# Altium PCB RF-2530.PcbDoc
Units mm, origin at the board's own origin, x right, y up, seen from the top; angles counter-clockwise.
Board outline 32 x 39.69 mm, 2 copper layers (Top Layer, Bottom Layer); 36 components, 37 nets, 133 pads, 92 vias.
Unrouted connection lines stored in the file: 6.
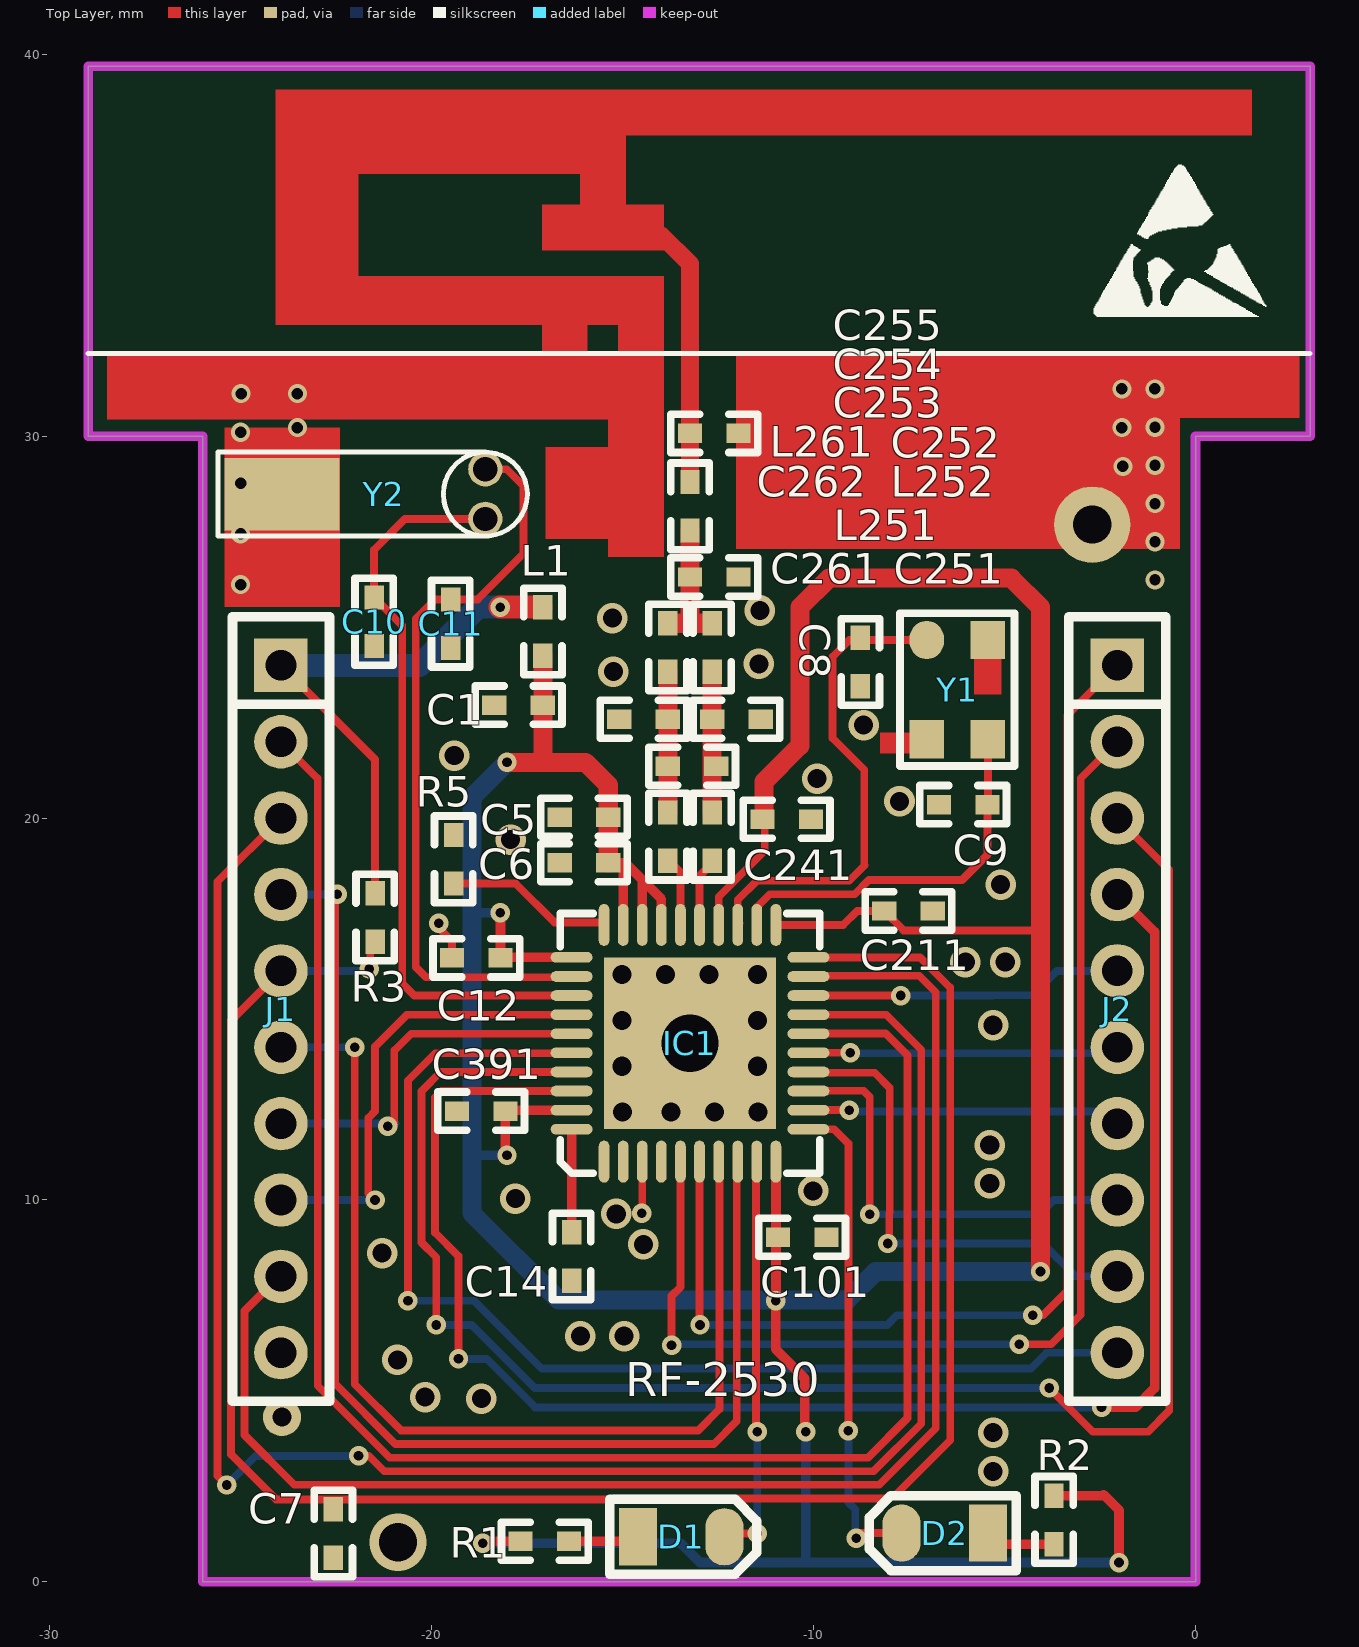
[diagram p0: Top Layer view]
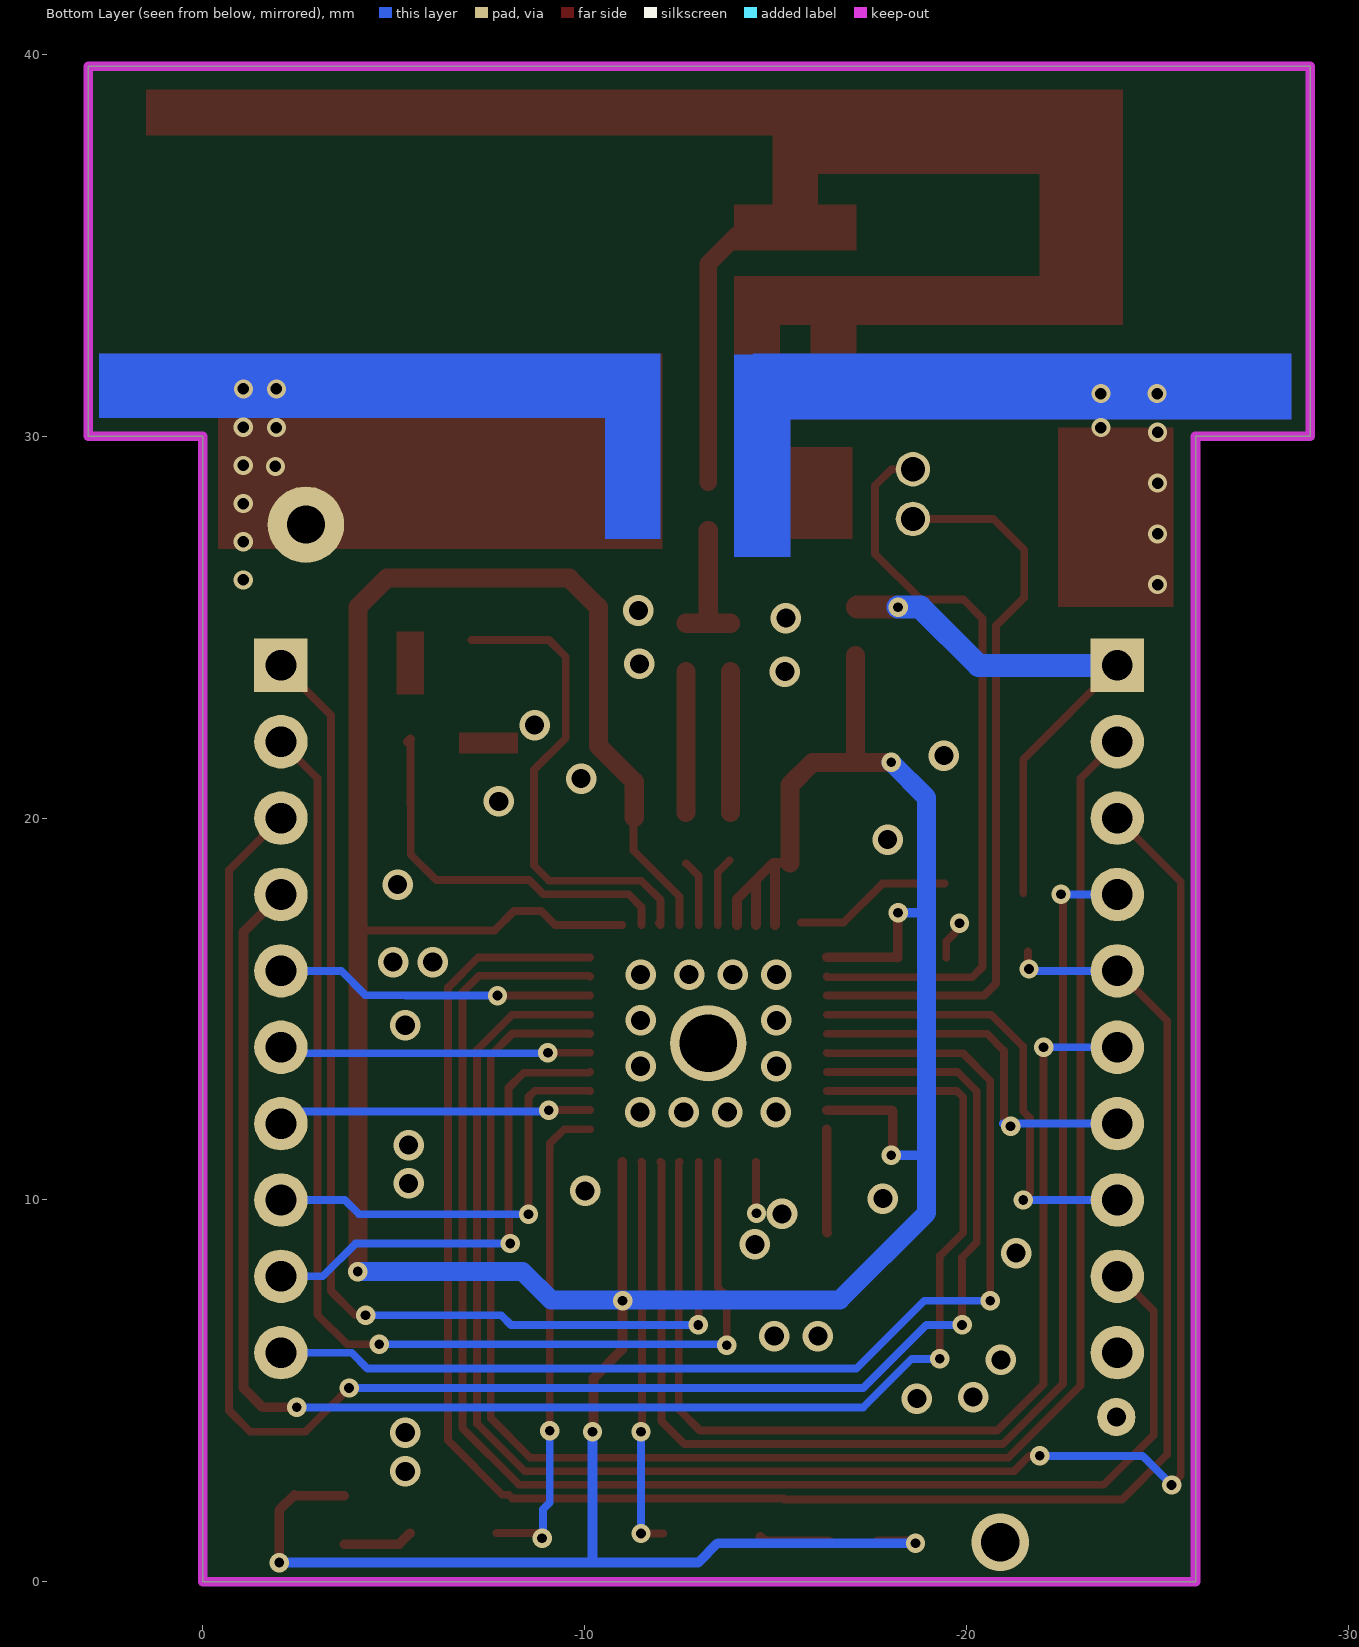
[diagram p1: Bottom Layer view, seen from below]

## Layer stack, top to bottom
Top Layer: signal copper 0.0356
Dielectric: dielectric 0.32, FR-4, Dk 4.8
Bottom Layer: signal copper 0.0356

## Board outline
-29,30 -29,39.692 3,39.692 3,30 0,30 0,0 -26,0 -26,30

## Design rules (kind name [scope] priority, off if disabled: settings)
Clearance Clearance_1 [All] p1 off: gap=0.4
Clearance [All] p2: gap=0.152
FabricationTestPointUsage TestPointUsage [All] p1: valid=0 allowmultiple=FALSE
FabricationTestpoint Testpoint [All] p1: side=3 testpointundercomponent=TRUE minsize=1.016 maxsize=2.54 preferedsize=1.524 minholesize=0 maxholesize=1.016 preferedholesize=0.813 testpointgrid=0.025 allowsidetop=TRUE allowsidebottom=TRUE usegrid=TRUE gridtolerance=0
MinimumSolderMaskSliver [All] p1: minsoldermaskwidth=0.01
PolygonConnect [All] p1: connectstyle=Direct reliefconductorwidth=0.254 reliefentries=4 polygonreliefangle="90 Angle" airgapwidth=0.254
RoutingVias [All] p1: holewidth=0.254 width=0.508 viastyle="Through Hole" minholewidth=0.203 minwidth=0.508 maxholewidth=0.711 maxwidth=1.27
SilkToSilkClearance [All] p1: silktosilkclearance=0
SilkToSolderMaskClearance SilkscreenOverComponentPads [IsPad] p1: minsilkscreentomaskgap=0 clearancetoexposedcopper=TRUE
SolderMaskExpansion [All] p1: expansion=0.102
Width [All] p1: maxlimit=2.032 minlimit=0.2 preferedwidth=0.203
23 further rules are at their usual default settings.

## Components (designator, comment, footprint, x,y, rotation, side; value= is the part's Value field where it differs from the comment)
C1 "2.2u" 0402 -17.092,22.959 r180 top
C5 "0.1" 0402 -15.381,20.024 r180 top
C6 "220p" 0402 -15.381,18.83 r180 top
C7 "0.1" 0402 -22.578,1.902 r270 top
C8 "27pF" 0402 -8.777,24.723 r270 top
C9 "27pF" 0402 -5.449,20.354 r180 top
C10 "15pF" 0402 -21.512,25.778 r270 top
C11 "15pF" 0402 -19.507,25.727 r270 top
C12 "0.1" 0402 -18.2,16.341 r180 top
C14 "1uF" 0402 -16.339,9.157 r270 top
C101 "0.1" 0402 -10.936,9.025 r0 top
C211 "0.1" 0402 -8.153,17.568 r0 top
C241 "0.1" 0402 -11.342,19.973 r0 top
C251 "18p" 0402 -12.659,18.881 r90 top
C252 "1p" 0402 -12.659,23.834 r90 top
C253 "" 0402 -13.239,26.314 r0 top
C254 "2.2p" 0402 -13.239,27.531 r90 top
C255 "" 0402 -13.239,30.074 r0 top
C261 "18p" 0402 -13.819,18.881 r90 top
C262 "1p" 0402 -13.819,22.589 r180 top
C391 "1u" 0402 -18.073,12.327 r180 top
D1 "LED" LED-0603 -15.339,0.251 r0 top
D2 "LED" LED-0603 -4.697,2.207 r180 top
IC1 "CC2530" PVQFN-N40 -15.489,11.004 r90 top locked
J1 "CON10" SIP10-2.0 -23.95,24 r270 top locked
J2 "CON10" SIP10-2.0 -2.05,24 r270 top locked
L1 "?H" 0402 -17.092,24.254 r90 top
L251 "" 0402 -13.819,21.359 r0 top
L252 "2nH" 0402 -12.659,22.589 r0 top
L261 "2nH" 0402 -13.819,23.834 r90 top
R1 "330R" 0402 -16.406,1.064 r180 top
R2 "330R" 0402 -3.706,0.988 r90 top
R3 "10K" 0402 -21.486,16.761 r90 top
R5 "56K" 0402 -19.429,18.285 r90 top
Y1 "32M" XT-SMD3225 -7.738,25.364 r270 top
Y2 "32.768K" XT_3 -18.599,27.836 r90 top

## Footprints (in the part's own frame and the unit in brackets; to place one, negate y for a bottom-side part, rotate by r counter-clockwise, add the part's x,y. Pads: shape width x height; smd on the part's side, far side on the other; paste and mask are expansions set on the pad)
0402 [mil]
  rect 25x20 smd: 1(0,0) 2(50,0)
  silkscreen extent -20,-20 70,20
LED-0603 [mm]
  rect 1x1.5 smd: A(0.737,0.93)
  oval 1x1.5 smd: K(3,0.93)
  silkscreen extent 0,-0.05 3.84,1.91
PVQFN-N40 [mm]
  oval 1.1x0.28 smd: 1(0,0) 2(0,-0.5) 3(0,-1) 4(0,-1.5) 5(0,-2) 6(0,-2.5) 7(0,-3) 8(0,-3.5) 9(0,-4) 10(0,-4.5) 21(6.2,-4.5) 22(6.2,-4) 23(6.2,-3.5) 24(6.2,-3) 25(6.2,-2.5) 26(6.2,-2) 27(6.2,-1.5) 28(6.2,-1) 29(6.2,-0.5) 30(6.2,0)
  oval 0.28x1.1 smd: 11(0.85,-5.35) 12(1.35,-5.35) 13(1.85,-5.35) 14(2.35,-5.35) 15(2.85,-5.35) 16(3.35,-5.35) 17(3.85,-5.35) 18(4.35,-5.35) 19(4.85,-5.35) 20(5.35,-5.35) 31(5.35,0.85) 32(4.85,0.85) 33(4.35,0.85) 34(3.85,0.85) 35(3.35,0.85) 36(2.85,0.85) 37(2.35,0.85) 38(1.85,0.85) 39(1.35,0.85) 40(0.85,0.85)
  rect 4.5x4.5 smd: 41(3.1,-2.25)
  silkscreen extent -0.3,-5.65 6.5,1.15
SIP10-2.0 [mm]
  rect 1.4x1.4 hole 0.8: 1(0,0)
  round 1.4 hole 0.8: 2(2,0) 3(4,0) 4(6,0) 5(8,0) 6(10,0) 7(12,0) 8(14,0) 9(16,0) 10(18,0)
  silkscreen extent -1.27,-1.27 19.27,1.27
XT-SMD3225 [mm]
  oval 1x0.9 smd: 1(0.7,0.7)
  rect 1x0.9 smd: 2(3.3,2.3) 3(3.3,0.7) 4(0.7,2.3)
  silkscreen extent 0,0 4,3
XT_3 [mm]
  round 0.9 hole 0.635: 1(1.3,0) 2(0,0)
  rect 1.9x3 smd: ""(0.65,5.325)
  silkscreen extent -0.45,-1.1 1.75,7

## Part data
C1 C5 C6 C7 C8 C9 C10 C11 C12 C14 C101 C211 C241 C251 C252 C253 C254 C255 C261 C262 C391: library part CAP, "Capacitor"
IC1: library part CC2430
J1 J2: "Connector"
L1 L251 L252 L261: library part INDUCTOR
R1 R2 R3 R5: library part RES2
Y1: library part CRY
Y2: library part CRYSTAL, "Crystal"

## Free pads (board coordinates)
  round 2 hole 1.5: 0(-13.239,14.104)
  round 2 hole 1: 1(-2.703,27.686)
  round 1 hole 0.5: 4(-23.925,4.315)

## Via types
v1: diameter 0.8, hole 0.5, Top Layer to Bottom Layer, 39 vias
v2: diameter 0.508, hole 0.254, Top Layer to Bottom Layer, 36 vias
v3: diameter 0.5, hole 0.3, Top Layer to Bottom Layer, 16 vias
v4: diameter 1.5, hole 1, Top Layer to Bottom Layer, 1 vias

## Nets (pads, with @x,y where several pads share a name; then routed paths per layer and width w, separated by ;. In a path a pad name is that pad's centre, name@x,y a point inside that pad or via, vN(x,y) a via of type N, cw(c..) or ccw(c..) an arc to the next point about the centre after c; other vN are vias at no path point)
1VCC1.8: C14.1 IC1.40 | length 2.7
  Top Layer w0.254: C14.1@-16.355,9.141 C14.1 IC1.40
CSN: IC1.6 J2.1 | length 31.3
  Top Layer w0.203: IC1.6 -12.989,6.74 v2(-12.977,6.728) ; v2(-4.265,6.982) -3.995,6.982 -3.36,7.617 -3.36,22.69 J2.1
  Bottom Layer w0.203: v2(-12.977,6.728) -8.075,6.728 -7.821,6.982 -5.916,6.982 v2(-4.265,6.982) ; J2.1@-2.05,23.908 J2.1
DC: IC1.34 J1.8 | length 12.1
  Top Layer w0.203: v2(-21.486,10) -21.664,10.178 -21.664,12.145 -21.486,12.323 -21.486,14.018 -20.65,14.854 IC1.34
  Bottom Layer w0.203: J1.8 v2(-21.486,10)
DD: IC1.35 J1.7 | length 10.2
  Top Layer w0.203: v2(-21.156,11.935) -21.029,11.935 -20.981,11.982 -20.981,13.913 -20.541,14.354 IC1.35
  Bottom Layer w0.203: J1.7 -20.953,12 -21.018,11.935 v2(-21.156,11.935)
GND: C1.2 C5.2 C6.2 C7.2 C8.2 C9.2 C10.2 C11.2 C12.2 C14.2 C101.2 C211.2 C241.2 C253.2 C254.2 C255.1 C255.2 C262.2 C391.2 IC1.1 IC1.2 IC1.3 IC1.4 IC1.41 J1.10 L252.2 pad.0 pad.1 pad.4 R5.2 Y1.3 Y1.4 Y2. | length 9.2
  Top Layer w0.2: v2@-19.945,17.244 -19.47,16.769 C12.2 ; v2(-14.501,9.649) -14.489,9.661 IC1.3
  Top Layer w0.46: -13.989,35.262 -13.239,34.512 ; C254.2 -13.239,31.961 -13.239,34.511
  other v1: -5.303,2.893 -5.303,3.909 -18.703,4.798 -20.173,4.837 -20.903,5.814 -16.109,6.437 -14.966,6.437 -21.303,8.608 -14.458,8.837 -15.17,9.637 -17.811,10.037 -10.013,10.237 -5.391,10.437 -5.391,11.437 -15.01,12.304 -13.74,12.304 -12.597,12.304 -11.454,12.304 -15.024,13.504 -11.468,13.504 -5.303,14.577 -15.024,14.704 -11.468,14.704 -15.024,15.904 -13.881,15.904 -12.738,15.904 -11.468,15.904 -6.026,16.228 -4.984,16.228 -5.103,18.26 -17.938,19.437 -7.753,20.437 -9.912,21.037 -19.411,21.637 -8.693,22.437 -15.246,23.837 -11.436,24.037 -15.271,25.237 -11.41,25.437
  other v2: -19.818,17.244
  other v3: -25.005,26.114 -1.062,26.237 -1.062,27.237 -25.005,27.444 -1.062,28.237 -25.005,28.775 -1.905,29.21 -1.062,29.237 -25.005,30.106 -23.52,30.226 -1.93,30.226 -1.062,30.237 -24.994,31.115 -23.52,31.115 -1.93,31.242 -1.067,31.242
  other v4: -20.885,1.037
LED1: D2.K IC1.11 | length 12.9
  Top Layer w0.203: IC1.11 -9.467,11.854 -9.091,11.478 v2(-9.091,3.959) ; v2(-8.888,1.14) -8.751,1.277 D2.K
  Bottom Layer w0.203: v2(-9.091,3.959) -9.091,2.08 -8.913,1.902 -8.913,1.165 v2(-8.888,1.14)
LED2: D1.K IC1.9 | length 10.3
  Top Layer w0.203: D1.K@-12.063,1.267 v2(-11.479,1.267) ; IC1.9 -11.507,10.986 -11.507,6.474 -11.507,3.963 v2(-11.479,3.934)
  Bottom Layer w0.203: v2(-11.479,1.267) v2(-11.479,3.934)
MISO: IC1.37 J2.3 | length 47.5
  Top Layer w0.203: v2(-19.886,6.728) -19.886,8.503 -20.27,8.887 -20.27,12.846 -19.763,13.354 IC1.37 ; v2(-3.833,5.077) -2.69,3.934 -1.242,3.934 -0.69,4.487 -0.69,16.38 ; J2.3 -0.69,18.64 -0.69,16.38 ; -0.69,16.833 -0.69,16.38
  Bottom Layer w0.203: v2(-19.886,6.728) -18.951,6.728 -17.3,5.077 -5.408,5.077 v2(-3.833,5.077)
MOSI: IC1.38 J2.4 | length 43
  Top Layer w0.203: v2(-19.302,5.839) -19.302,8.531 -19.915,9.144 -19.915,12.687 -19.748,12.854 IC1.38
  Top Layer w0.254: v2(-2.462,4.569) -1.573,4.569 -1.071,5.071 -1.071,17.021 J2.4
  Bottom Layer w0.203: v2(-19.302,5.839) -18.565,5.839 -17.295,4.569 v2(-2.462,4.569)
NetC1_1: C1.1 C5.1 C6.1 C12.1 C101.1 C211.1 C241.1 C391.1 IC1.10 IC1.21 IC1.24 IC1.27 IC1.28 IC1.29 IC1.31 IC1.39 L1.1 R1.2 R2.2 | length 121.7
  Top Layer w0.203: IC1.24 -12.489,17.943 -11.283,19.149 -11.283,19.914 C241.1 ; IC1.21 -9.226,17.204 -8.861,17.568 C211.1 -7.645,17.06 -6.051,17.06 -4.259,17.06 -4.062,16.863
  Top Layer w0.254: v2@-18.616,1.064 R1.2 ; v2@-18.2,17.514 C12.1 -18.187,16.354 IC1.31 ; v2@-18.073,11.214 C391.1 -18.047,12.354 IC1.39 ; C6.1@-15.344,18.793 C6.1 -14.94,18.83 -14.903,18.793 ; -15.009,18.793 -14.903,18.793 ; IC1.29 -14.989,18.773 ; IC1.28 -14.489,18.379 ; IC1.27 -13.989,17.879 -14.489,18.379 ; v2(-10.996,7.363) -10.996,6.093 -10.234,5.331 v2@-10.234,3.959 ; v2@-10.989,7.37 IC1.10 ; R2.2 -2.436,2.258 -2.411,2.283 -2.004,1.877 v2(-2.004,0.505) ; -14.903,18.793 -14.489,18.379
  Top Layer w0.5: v2(-18.032,21.46) -17.041,21.46 ; L1.1 C1.1 -17.092,21.511 -17.041,21.46 ; C6.1 C5.1 -15.381,20.866 -15.974,21.46 -17.041,21.46 ; C241.1@-11.301,20.014 -11.301,20.952 -10.361,21.892 -10.361,25.524 -9.599,26.286 -4.824,26.286 -4.062,25.524 -4.062,16.863 v2(-4.062,8.125)
  Bottom Layer w0.254: -18.953,11.173 v2(-18.032,11.173) ; -18.953,17.523 v2(-18.21,17.523) ; v2(-18.667,1.013) -13.485,1.013 -12.977,0.505 -10.209,0.505 ; v2(-10.209,3.934) -10.209,0.505 ; v2(-2.004,0.505) -10.209,0.505
  Bottom Layer w0.5: v2(-18.032,21.46) -18.953,20.539 -18.953,17.523 -18.953,11.173 -18.953,9.655 -16.682,7.384 -9.12,7.384 -8.38,8.125 v2(-4.062,8.125)
NetC8_1: C8.1 IC1.23 Y1.1 | length 12.9
  Top Layer w0.203: IC1.23@-11.944,17.249 IC1.23 -11.989,17.859 -11.485,18.363 -9.072,18.363 -8.667,18.768 -8.675,18.776 -8.675,21.264 -9.505,22.094 -9.505,24.229 -9.07,24.664 Y1.1
NetC9_1: C9.1 IC1.22 Y1.2 | length 10.2
  Top Layer w0.203: IC1.22 -11.489,17.671 -11.152,18.008 -9.277,18.008 -8.925,18.008 -8.553,18.379 -6.114,18.379 -5.449,19.044 C9.1 ; C9.1@-5.438,20.354 Y1.2
  Top Layer w0.254: Y1.2 Y1.2@-5.373,21.999
NetC10_1: C10.1 IC1.33 Y2.2 | length 19.5
  Top Layer w0.203: Y2.2 -20.704,27.836 -21.512,27.028 C10.1 -20.775,25.041 -20.775,15.669 -20.46,15.354 IC1.33
NetC11_1: C11.1 IC1.32 Y2.1 | length 19.8
  Top Layer w0.203: Y2.1 -18.036,29.136 -17.602,28.702 -17.602,26.924 -18.799,25.727 C11.1 -19.914,25.727 -20.419,25.221 -20.419,16.101 -20.151,15.833 -16.36,15.833 IC1.32
NetC251_1: C251.1 IC1.25 | length 1.7
  Top Layer w0.203: IC1.25 -12.989,18.485 C251.1@-12.659,18.815
NetC251_2: C251.2 C252.1 L251.2 L252.1 | length 3.7
  Top Layer w0.5: C251.2 C252.1
NetC252_2: C252.2 C253.1 C254.1 L261.2 | length 3.6
  Top Layer w0.5: L261.2 C252.2 ; -13.239,25.112 C254.1
NetC254_2: 
NetC261_1: C261.1 IC1.26 | length 1.8
  Top Layer w0.203: C261.1@-13.798,18.895 -13.489,18.586 IC1.26
NetC261_2: C261.2 C262.1 L251.1 L261.1 | length 3.7
  Top Layer w0.5: C261.2 L261.1
NetD1_A: D1.A R1.1 | length 1.9
  Top Layer w0.254: R1.1 -14.72,1.064 D1.A
NetD2_A: D2.A R2.1 | length 1.8
  Top Layer w0.254: D2.A -5.144,0.988 R2.1
NetIC1_30: IC1.30 R5.1 | length 4.2
  Top Layer w0.203: R5.1 -17.803,18.285 -16.787,17.269 -15.67,17.269
P00: IC1.19 J1.9 | length 38.8
  Top Layer w0.203: J1.9 -23.999,8 -24.904,7.095 -24.904,3.847 -23.598,2.541 -8.285,2.541 -6.805,4.02 -6.805,15.44 -7.237,15.872 -10.121,15.872 IC1.19
P01: IC1.18 J2.5 | length 8.4
  Top Layer w0.203: IC1.18 v2(-7.719,15.354)
  Bottom Layer w0.203: v2(-7.719,15.354) -5.317,15.354 -5.306,15.364 -4.265,15.364 -3.629,16 J2.5
P1.2: IC1.8 J1.4 | length 32.6
  Top Layer w0.203: v2(-22.477,18.006) -22.502,18.031 -22.528,18.031 -22.528,5.184 -20.951,3.607 -12.877,3.607 -12.618,3.607 -12.012,4.213 -12.012,5.077 -12.012,10.981 IC1.8
  Bottom Layer w0.203: J1.4 -22.482,18 v2(-22.477,18.006)
P1.3: IC1.7 J1.6 | length 27.5
  Top Layer w0.203: v2(-22.02,14) -22.02,5.179 -20.804,3.963 -13.024,3.963 -12.469,4.518 -12.469,10.984 IC1.7
  Bottom Layer w0.203: J1.6 v2(-22.02,14)
P02: IC1.17 J1.3 | length 50.6
  Top Layer w0.203: v2(-25.372,2.537) -25.615,2.78 -25.615,18.335 J1.3 ; v2(-21.918,3.299) -21.649,3.299 -21.246,2.896 -8.432,2.896 -7.186,4.142 -7.186,13.936 -8.103,14.854 IC1.17
  Bottom Layer w0.203: v2(-25.372,2.537) -24.61,3.299 v2(-21.918,3.299)
P03: IC1.16 J1.2 | length 46.3
  Top Layer w0.203: J1.2 -22.985,21.035 -22.985,5.138 -21.099,3.252 -8.579,3.252 -7.542,4.29 -7.542,4.876 -7.542,13.789 -8.114,14.362 -10.131,14.362 IC1.16 IC1.16@-10.134,14.348
P04: IC1.15 J2.6 | length 8.2
  Top Layer w0.203: IC1.15 v2(-9.04,13.854)
  Bottom Layer w0.203: v2(-9.04,13.854) -9.027,13.84 -7.516,13.84 -2.21,13.84 J2.6
P05: IC1.14 J2.9 | length 12.8
  Top Layer w0.203: IC1.14 -10.118,13.332 -8.405,13.332 -8.007,12.934 -8.007,9.668 -8.024,9.65 -8.024,8.895 v2(-8.058,8.862)
  Bottom Layer w0.203: v2(-8.058,8.862) -4.004,8.862 -3.142,8 J2.9
P06: IC1.13 J2.8 | length 11.4
  Top Layer w0.203: IC1.13 -10.131,12.862 -8.697,12.862 -8.532,12.697 v2(-8.532,9.624)
  Bottom Layer w0.203: v2@-8.515,9.624 -4.095,9.624 -3.719,10 J2.8
P07: IC1.12 J2.7 | length 8.3
  Top Layer w0.203: IC1.12 v2(-9.066,12.354)
  Bottom Layer w0.203: v2(-9.066,12.354) -9.066,12.316 -2.366,12.316 J2.7
P20: IC1.36 J2.10 | length 29.8
  Top Layer w0.203: v2(-20.626,7.363) -20.626,13.125 -19.911,13.84 -16.353,13.84 IC1.36
  Bottom Layer w0.203: v2(-20.626,7.363) -18.895,7.363 -17.117,5.585 -4.316,5.585 -3.901,6 J2.10
RESET_N: C7.1 IC1.20 J1.5 R3.1 | length 51.9
  Top Layer w0.203: J1.5 -25.26,14.69 -25.26,3.339 -24.077,2.156 -15.237,2.156 -15.208,2.185 -8.105,2.185 -8.009,2.281 -7.849,2.281 -6.424,3.705 -6.424,15.562 -7.215,16.354 IC1.20 ; v2(-21.639,16.05) -21.613,16.075 R3.1@-21.613,16.507
  Bottom Layer w0.203: J1.5 -21.688,16 v2(-21.639,16.05)
SCK: IC1.5 J2.2 | length 31.5
  Top Layer w0.203: v2(-13.722,6.195) -13.722,7.486 -13.489,7.719 IC1.5 ; v2(-4.621,6.22) -3.782,6.22 -3.004,6.998 -3.004,21.046 J2.2
  Bottom Layer w0.203: v2(-13.722,6.195) -13.697,6.22 v2(-4.621,6.22) ; J2.2@-2.05,21.841 J2.2
VDD_3.3V: J1.1 L1.2 R3.2 | length 14.4
  Top Layer w0.203: J1.1 -21.486,21.536 R3.2
  Top Layer w0.6: v2(-18.21,25.524) L1.2@-17.145,25.524
  Bottom Layer w0.6: J1.1 -20.318,24 -18.794,25.524 v2(-18.21,25.524)

## Keep-outs
Keep-Out Layer:
  the board outline again, w0.254

## Other copper
Top Layer:
  rectangle net GND: -28.508,30.437 -14.41,32.172
  rectangle net GND: -15.392,26.837 -13.919,32.141
  region net GND: 2.718,32.172 -11.557,32.172 -11.557,30.48 2.718,30.48
  rectangle net GND: -25.425,25.527 -22.403,30.226
  rectangle net GND: -17.018,27.305 -14.41,29.718
  rectangle net GND: -12.04,27.051 -0.406,32.172
  rectangle net GND: -17.119,32.141 -15.919,32.941
  rectangle net GND: -24.099,34.202 -21.919,39.082
  rectangle net GND: -21.919,36.872 -16.119,39.082
  rectangle net GND: -16.119,36.072 -14.919,39.082
  rectangle net GND: -15.119,32.141 -13.919,32.941
  rectangle net GND: -24.099,32.912 -13.919,34.202
  rectangle net GND: -17.119,34.862 -13.919,36.072
  rectangle net GND: -14.919,37.872 1.481,39.082
  rectangle net GND: -5.797,23.237 -5.081,24.888
  rectangle net GND: -8.261,21.689 -6.711,22.237
Bottom Layer:
  rectangle net GND: -28.508,30.437 -14.41,32.172
  rectangle net GND: -15.392,26.837 -13.919,32.141
  rectangle net GND: -11.989,27.305 -10.541,32.172
  region net GND: 2.718,32.172 -11.557,32.172 -11.557,30.48 2.718,30.48

## Silkscreen, mask and mechanical layers (free items; w line width, h text height)
Top Overlay:
  drawing of 298 lines, arcs and shapes, not listed
  text "RF-2530" at -14.941,4.565 h1.52
Mechanical 1:
  the board outline again, w0.254